# EAGLE board MorsePlay_schematic (EAGLE 8.5.2)
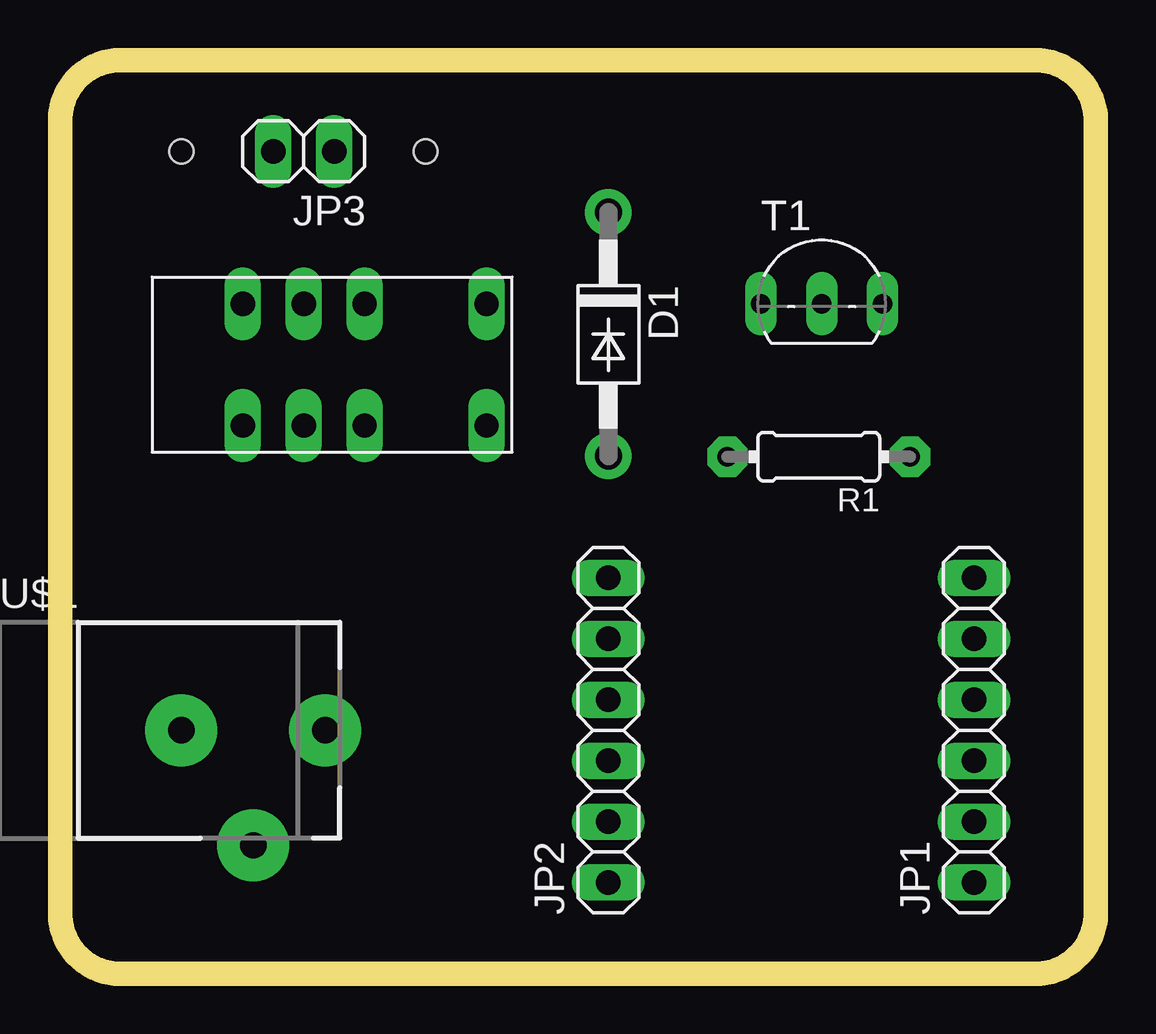
[diagram p0: board, top side]
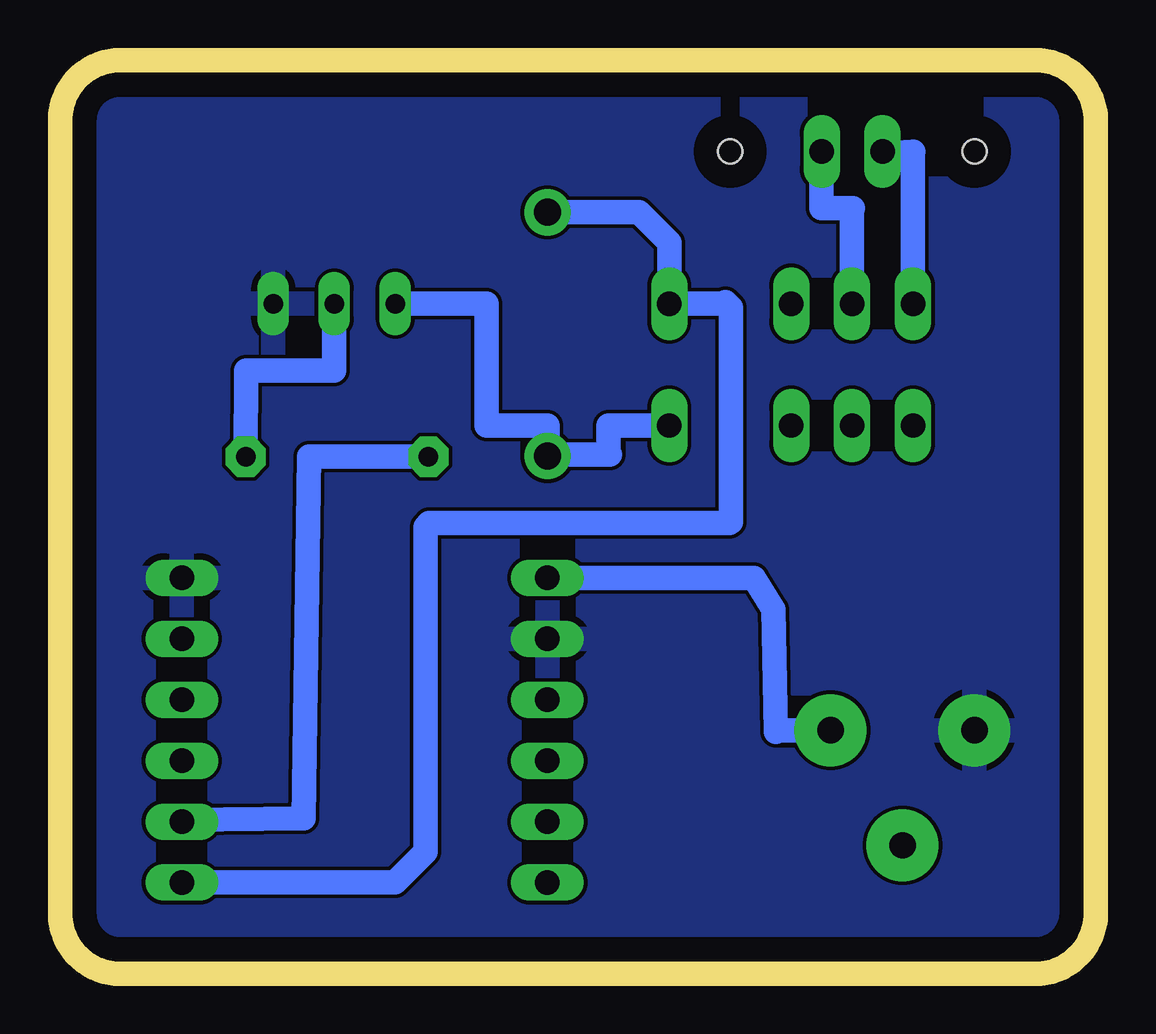
[diagram p1: board, bottom side, seen from below]

Size 43.18 x 38.1 mm. Coordinates in mm from the lower left corner, seen from the top.
Outline: 0,35.56 0,2.54 arc90 2.54,0 40.64,0 arc90 43.18,2.54 43.18,35.56 arc90 40.64,38.1 2.54,38.1 arc90 0,35.56
Copper layers (1*16): Top 0.035mm / dielectric 1.5mm / Bottom 0.035mm
Design rules "default": minimum track width 6mil, minimum drill 0.35mm, track to track 6mil, track to pad 6mil, pad to pad 6mil, via to via 6mil, smd to smd 6mil, copper to edge 40mil, drill to drill 6mil, minimum pad ring 10mil, minimum via ring 8mil, stop-mask expansion 4mil, vias tented up to drill 0mil, thermal gap 10mil
Holes 1 mm at 5.06,34.29 15.24,34.29

## Footprints (pad centres in the part's own frame; a part is rotated, then mirrored left to right if it is on the bottom)
DO41-10 = drill 1.118 pad 1.93: A 5.08,0; C -5.08,0
1X06 = drill 1.016 long: 1 -6.35,0; 2 -3.81,0; 3 -1.27,0; 4 1.27,0; 5 3.81,0; 6 6.35,0
1X02 = drill 1.016 long: 1 -1.27,0; 2 1.27,0
0204/7 = drill 0.813 pad 1.676 octagon: 1 -3.81,0; 2 3.81,0
351 = drill 1.016 long: 1 -10.16,0; 16 -10.16,5.08; O1 -2.54,0; O2 -2.54,5.08; P1 -5.08,0; P2 -5.08,5.08; S1 0,0; S2 0,5.08
TO92-EBC-OVAL = drill 0.813 long: B 0,-1.27; C 2.54,-1.27; E -2.54,-1.27
DCJACK_2MM_PTH = drill 1.1 pad 3: GND 0,7.6; GNDBREAK 4.8,10.6; PWR 0,13.6

## Placement (x,y rotation side)
D1  1N4004  [DO41-10]  22.86,26.67 270 top
JP1  [1X06]  38.1,10.16 90 top
JP2  [1X06]  22.86,10.16 90 top
JP3  [1X02]  10.16,34.29 180 top
R1  [0204/7]  31.63,21.56 180 top
RELAY1  [351]  7.62,27.94 180 top
T1  2N2222  [TO92-EBC-OVAL]  31.75,29.21 0 top
U$1  DCPOWERJACK  [DCJACK_2MM_PTH]  -2.54,10.16 270 top

## Library data of the parts
D1 T1 = adafruit
JP1-JP3 = pinhead
R1 = adafruitV2
RELAY1 = JOB Parts; OC_FARNELL: unknown; OC_NEWARK: unknown
U$1 = JOB Parts

## Nets
BASE: R1.1 T1.B
EMMITTER: D1.A RELAY1.16 T1.E
GND: JP1.6 JP2.5 T1.C U$1.GND
N$4: RELAY1.P1
PIN0: JP1.4
PIN1: JP1.3
PIN2: JP1.2 R1.2
PIN3: JP1.5
PIN4: JP2.3
PIN5: JP2.4
SWCLK: JP2.1
SWDIO: JP2.2
SWITCH1: JP3.1 RELAY1.O1
SWITCH2: JP3.2 RELAY1.S1
VDD: D1.C JP1.1 RELAY1.1
VIN: JP2.6 U$1.PWR

## Tracks (layer width: path | path; a pad name or v marks a point on that pad's centre or on a via)
BASE
  Bottom 1.016: T1.B 31.75,25.16 35.41,25.16 R1.1
EMMITTER
  Bottom 1.016: T1.E 25.4,27.94 25.4,22.86 22.86,22.86 D1.A 22.79,21.66 20.26,21.66 20.32,21.72 20.32,22.86 RELAY1.16
GND
  pour Bottom: 0,38.1 0,0 43.18,0 43.18,38.1
PIN2
  Bottom 1.016: R1.2 32.79,21.57 33.02,6.48 38.03,6.42 JP1.2
SWITCH1
  Bottom 1.016: JP3.1 11.45,34.27 11.45,31.93 10.13,31.93 10.16,31.9 RELAY1.O1
SWITCH2
  Bottom 1.016: RELAY1.S1 7.62,34.28 7.61,34.27 8.81,34.21 JP3.2
VDD
  Bottom 1.016: D1.C 19.05,31.75 17.78,30.48 RELAY1.1 15.5,27.94 15.44,28 15.21,27.77 15.21,18.85 15.27,18.79 27.79,18.79 27.94,18.64 27.94,5.08 29.21,3.81 JP1.1
VIN
  Bottom 1.016: JP2.6 14.25,16.51 13.44,15.19 13.33,10.08 13.25,10.16 U$1.PWR